# EAGLE board SMS_Voteing (EAGLE 5.01)
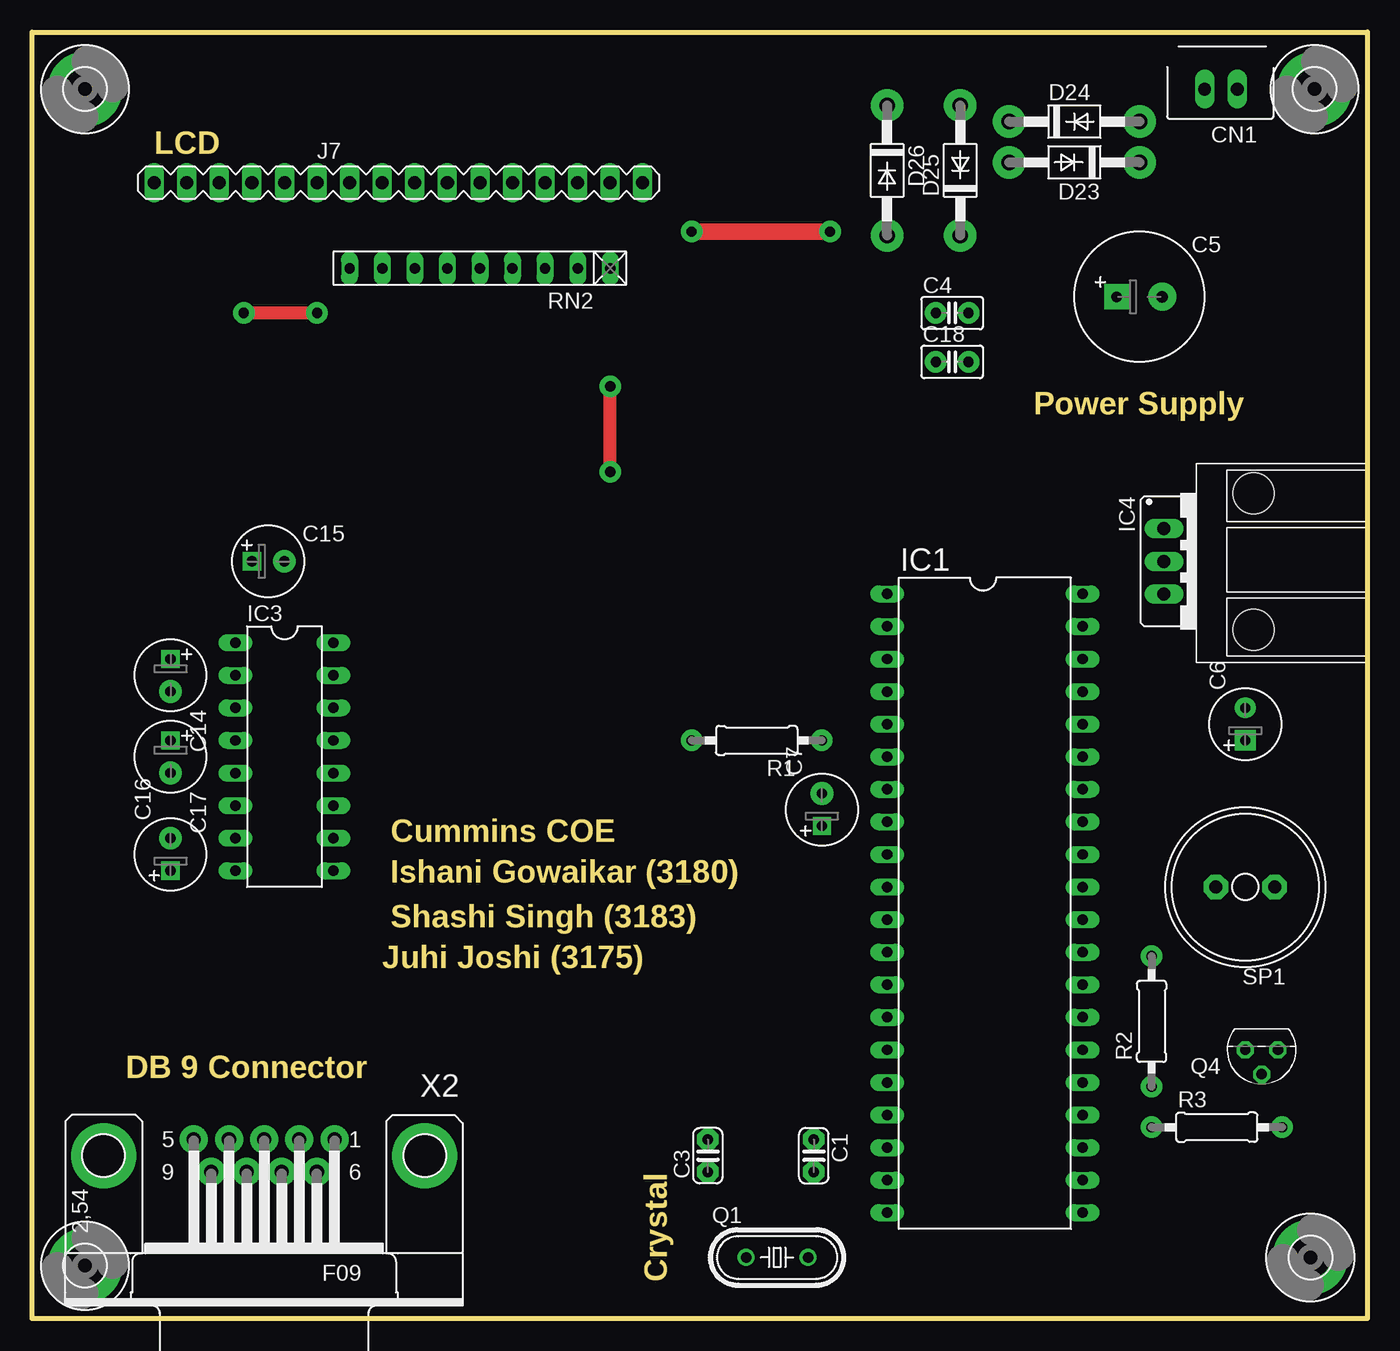
[diagram p0: board, top side]
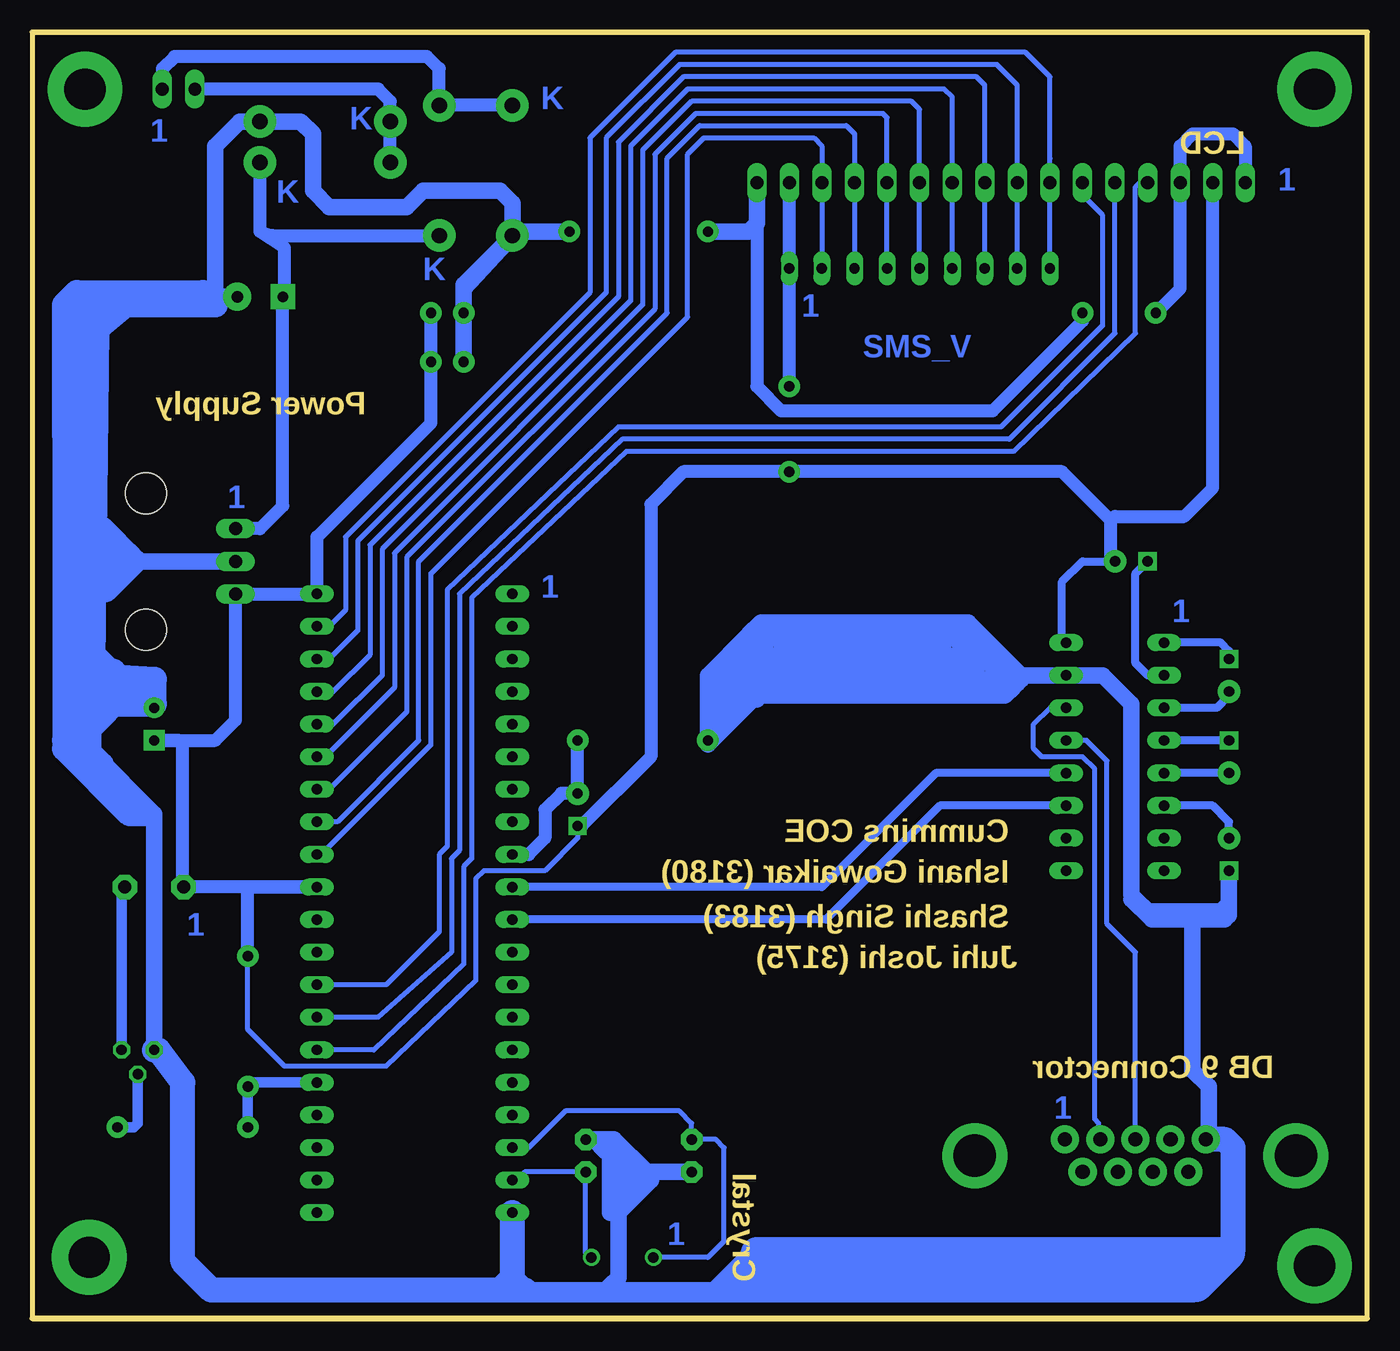
[diagram p1: board, bottom side, seen from below]

Size 104.14 x 100.33 mm. Coordinates in mm from the lower left corner, seen from the top.
Outline: 0.01,0.17 104.12,0.17 104.12,100.17 0.01,100.17 0.01,0.17
Outline: 0,100.33 104.14,100.33 104.14,0 0,0 0,100.33
Copper layers (1+16): Top 0.035mm / dielectric 1.5mm / Bottom 0.035mm
Design rules "default": minimum track width 10mil, minimum drill 24mil, track to track 12mil, track to pad 12mil, pad to pad 12mil, via to via 12mil, smd to smd 12mil, copper to edge 40mil, drill to drill 8mil, minimum pad ring 10mil, minimum via ring 8mil, stop-mask expansion 8mil, vias tented up to drill 0mil, thermal gap 10mil

## Footprints (pad centres in the part's own frame; a part is rotated, then mirrored left to right if it is on the bottom)
C025-024X044 = drill 0.813 pad 1.676 octagon: 1 -1.27,0; 2 1.27,0
C025-025X050 = drill 0.8 pad 1.676 round: 1 -1.27,0; 2 1.27,0
E3,5-10 = drill 0.813 pad 1.93 square: + -1.778,0 | drill 0.9 pad 2.184 round: - 1.778,0
E2,5-6 = drill 0.8 pad 1.6 square: + -1.27,0 | drill 0.8 pad 1.6 round: - 1.27,0
E2,5-6@1 = drill 0.8 pad 1.422 square: + -1.27,0 | drill 0.8 pad 1.778 round: - 1.27,0
JP2 = drill 1 long: 1 2.54,0; 2 5.08,0
DO41-10 = drill 1.2 pad 2.54 round: A 5.08,0; C -5.08,0
3,2-PAD = drill 3.2 pad 5.842 round: B3,2 0,0
HEATSINK = hole 3.2: 2.31,4.445; 12.97,4.445
DIL40 = drill 0.813 long: 1 -24.13,-7.62; 2 -21.59,-7.62; 3 -19.05,-7.62; 4 -16.51,-7.62; 5 -13.97,-7.62; 6 -11.43,-7.62; 7 -8.89,-7.62; 8 -6.35,-7.62; 9 -3.81,-7.62; 10 -1.27,-7.62; 11 1.27,-7.62; 12 3.81,-7.62; 13 6.35,-7.62; 14 8.89,-7.62; 15 11.43,-7.62; 16 13.97,-7.62; 17 16.51,-7.62; 18 19.05,-7.62; 19 21.59,-7.62; 20 24.13,-7.62; 21 24.13,7.62; 22 21.59,7.62; 23 19.05,7.62; 24 16.51,7.62; 25 13.97,7.62; 26 11.43,7.62; 27 8.89,7.62; 28 6.35,7.62; 29 3.81,7.62; 30 1.27,7.62; 31 -1.27,7.62; 32 -3.81,7.62; 33 -6.35,7.62; 34 -8.89,7.62; 35 -11.43,7.62; 36 -13.97,7.62; 37 -16.51,7.62; 38 -19.05,7.62; 39 -21.59,7.62; 40 -24.13,7.62
DIL16 = drill 0.813 long: 1 -8.89,-3.81; 2 -6.35,-3.81; 3 -3.81,-3.81; 4 -1.27,-3.81; 5 1.27,-3.81; 6 3.81,-3.81; 7 6.35,-3.81; 8 8.89,-3.81; 9 8.89,3.81; 10 6.35,3.81; 11 3.81,3.81; 12 1.27,3.81; 13 -1.27,3.81; 14 -3.81,3.81; 15 -6.35,3.81; 16 -8.89,3.81
78XXS = drill 1.016 long: GND 0,-2.54; IN -2.54,-2.54; OUT 2.54,-2.54
JP16 = drill 1.016 pad 1.27 long: 1 -19.05,0; 2 -16.51,0; 3 -13.97,0; 4 -11.43,0; 5 -8.89,0; 6 -6.35,0; 7 -3.81,0; 8 -1.27,0; 9 1.27,0; 10 3.81,0; 11 6.35,0; 12 8.89,0; 13 11.43,0; 14 13.97,0; 15 16.51,0; 16 19.05,0
HC49/S = drill 0.813 round: 1 -2.413,0; 2 2.413,0
TO92 = drill 0.813 octagon: 1 1.27,0; 2 0,1.905; 3 -1.27,0
0207/10 = drill 0.8 pad 1.676 round: 1 -5.08,0; 2 5.08,0
RN-9 = drill 0.813 long: 1 -10.16,0; 2 -7.62,0; 3 -5.08,0; 4 -2.54,0; 5 0,0; 6 2.54,0; 7 5.08,0; 8 7.62,0; 9 10.16,0
AL11P = drill 1.016 pad 1.905 octagon: + 2.286,0; - -2.286,0
F09HP = drill 1.1 pad 2.184 round: 1 -5.486,-1.27; 2 -2.743,-1.27; 3 0,-1.27; 4 2.743,-1.27; 5 5.486,-1.27; 6 -4.115,1.27; 7 -1.372,1.27; 8 1.372,1.27; 9 4.115,1.27 | drill 3.302 pad 5.08 round: G1 -12.522,0; G2 12.522,0

## Placement (x,y rotation side)
C1  33pF  [C025-024X044]  60.96,12.7 270 top
C3  33pF  [C025-024X044]  52.7,12.7 90 top
C4  0.1uF  [C025-025X050]  71.76,78.42 0 top
C5  1000uF/25V  [E3,5-10]  86.36,79.69 0 top
C6  220uF/16v  [E2,5-6]  94.62,46.35 90 top
C7  1uF/16V  [E2,5-6@1]  61.59,39.69 90 top
C14  1uF/16V  [E2,5-6@1]  10.79,50.16 270 top
C15  1uF/16V  [E2,5-6@1]  18.42,59.05 0 top
C16  1uF/16V  [E2,5-6@1]  10.79,36.2 90 top
C17  1uF/16V  [E2,5-6@1]  10.79,43.81 270 top
C18  0.1uF  [C025-025X050]  71.76,74.61 0 top
CN1  JP2E  [JP2]  96.52,95.89 180 top
D23  1N4007  [DO41-10]  81.28,90.17 180 top
D24  1N4007  [DO41-10]  81.28,93.34 0 top
D25  1N4007  [DO41-10]  72.39,89.54 90 top
D26  1N4007  [DO41-10]  66.68,89.54 270 top
H1  MOUNT-PAD-ROUND3.2  [3,2-PAD]  4.13,95.89 0 top
H2  MOUNT-PAD-ROUND3.2  [3,2-PAD]  4.13,4.13 0 top
H3  MOUNT-PAD-ROUND3.2  [3,2-PAD]  99.7,4.76 0 top
H4  MOUNT-PAD-ROUND3.2  [3,2-PAD]  100.01,95.89 0 top
HS3  HSD  [HEATSINK]  90.81,66.68 270 top
IC1  89S52  [DIL40]  74.3,32.38 270 top
IC3  MAX232  [DIL16]  19.69,43.81 270 top
IC4  7805  [78XXS]  90.81,59.05 270 top
J7  16 PIN MALE BURG  [JP16]  28.58,88.58 0 top
Q1  11.0592MHz  [HC49/S]  58.1,4.76 0 top
Q4  BC547  [TO92]  95.89,20.96 180 top
R1  1K  [0207/10]  56.52,45.09 180 top
R2  1K  [0207/10]  87.31,23.18 90 top
R3  1K  [0207/10]  92.39,14.92 0 top
RN2  10K  [RN-9]  34.92,81.92 180 top
SP1  BUZZER  [AL11P]  94.62,33.66 180 top
X2  [F09HP]  18.1,12.7 180 top

## Library data of the parts
C1 C3-C7 C14-C18 R1-R3 = resistor
CN1 J7 = relimate
D23-D26 = diode
H1-H4 = holes
HS3 = HEATSINK
IC1 = micro-intel
IC3 = maxim
IC4 = v-reg
Q1 = crystal
Q4 = transistor-npn
RN2 = resistor-net
SP1 = buzzer
X2 = con-subd

## Nets
+5V: C4.2 C6.+ C7.+ C15.- C18.2 IC1.31 IC1.40 IC3.16 IC4.OUT J7.2 J7.15 R2.2 RN2.1 SP1.+
+12V_R: C5.+ D23.C D25.C IC4.IN
GND: C1.1 C3.1 C4.1 C5.- C6.- C16.+ C18.1 D24.A D26.A IC1.20 IC3.15 IC4.GND J7.1 J7.3 J7.16 Q4.1 R1.2 X2.5
N$1: IC3.14 X2.2
N$3: IC3.13 X2.3
N$6: IC1.6
N$10: C14.+ IC3.1
N$12: C14.- IC3.3
N$13: C17.+ IC3.4
N$14: C17.- IC3.5
N$15: C15.+ IC3.2
N$16: C16.- IC3.6
N$18: CN1.1 D25.A D26.C
N$22: C3.2 IC1.18 Q1.1
N$23: C1.2 IC1.19 Q1.2
N$24: Q4.2 R3.2
N$25: Q4.3 SP1.-
N$56: CN1.2 D23.A D24.C
P0.0: IC1.39 J7.7 RN2.9
P0.1: IC1.38 J7.8 RN2.8
P0.2: IC1.37 J7.9 RN2.7
P0.3: IC1.36 J7.10 RN2.6
P0.4: IC1.35 J7.11 RN2.5
P0.5: IC1.34 J7.12 RN2.4
P0.6: IC1.33 J7.13 RN2.3
P0.7: IC1.32 J7.14 RN2.2
P1.0: IC1.1
P1.1: IC1.2
P1.2: IC1.3
P1.3: IC1.4
P1.4: IC1.5
P1.6: IC1.7
P1.7: IC1.8
P2.0: IC1.21
P2.1: IC1.22
P2.2: IC1.23
P2.3: IC1.24
P2.4: IC1.25 R2.1 R3.1
P2.5: IC1.26 J7.4
P2.6: IC1.27 J7.5
P2.7: IC1.28 J7.6
P3.0: IC1.10 IC3.12
P3.1: IC1.11 IC3.11
P3.2: IC1.12
P3.3: IC1.13
P3.4: IC1.14
P3.5: IC1.15
P3.6: IC1.16
P3.7: IC1.17
RST: C7.- IC1.9 R1.1

## Tracks (layer width: path | path; a pad name or v marks a point on that pad's centre or on a via)
+5V  (via drill 0.8 pad 1.68)
  Top 1.016: v45.09,66.04 v45.09,72.71
  Bottom 0.406: C7.+ 61.59,37.46 64.14,34.92 68.9,34.92 69.53,34.29 69.53,26.35 76.52,19.69 84.45,19.69 87.31,22.54 R2.2
  Bottom 0.61: C15.- 22.23,59.05 23.81,57.47 23.81,53.02 IC3.16
  Bottom 1.016: 92.08,33.66 IC1.31 87,33.66 87.31,33.34 R2.2 | J7.15 RN2.1 v45.09,72.71 | 20,62.23 23.81,66.04 v45.09,66.04 53.34,66.04 55.88,63.5 55.88,43.81 61.28,38.42 C7.+ | 20,62.23 20,59.37 C15.- | J7.2 12.06,64.77 14.29,62.55 19.69,62.55 20,62.23 | C4.2 C18.2 73.03,69.85 81.92,60.96 IC1.40 IC4.OUT 88.27,46.67 89.85,45.09 C6.+ 92.71,45.09 92.39,44.77 92.39,33.97 92.08,33.66 | 92.08,33.66 SP1.+
+12V_R
  Bottom 1.016: 86.36,84.77 85.41,84.45 D25.C | 86.36,84.77 D23.C | 86.36,84.77 84.45,83.5 84.45,79.69 C5.+ 84.58,63.37 86.36,61.59 IC4.IN
GND  (via drill 0.8 pad 1.68)
  Top 1.016: v22.23,78.42 v16.51,78.42
  Top 1.27: v62.23,84.77 v51.43,84.77
  Bottom 1.016: J7.1 9.53,91.44 10.48,92.39 13.65,92.39 14.61,91.44 J7.3 14.61,80.33 v16.51,78.42 | v22.23,78.42 22.23,77.79 29.21,70.8 45.72,70.8 47.62,72.71 J7.16
  Bottom 1.27: 60.32,13.97 C1.1 | 60.32,13.97 58.74,13.97 56.2,11.43 | 56.2,11.43 C3.1 | 56.2,11.43 56.52,11.11 | 56.52,11.11 56.83,10.79 59.05,13.02 59.37,13.02 60.32,13.97 | 59.05,12.7 60.32,13.97 | 59.05,12.7 57.15,10.79 | 59.05,12.7 59.05,10.16 57.47,10.16 | 57.47,10.16 56.52,11.11 | 56.52,11.11 57.78,11.11 58.1,10.79 57.47,10.16 | 57.47,10.16 59.05,8.57 59.05,12.7 | 59.05,12.7 59.05,8.26 58.74,8.26 55.88,11.11 55.88,10.79 58.42,8.26 58.42,3.17 59.05,2.54 | 59.05,2.54 59.37,2.22 65.72,2.22 66.36,2.86 66.36,7.62 66.68,7.94 IC1.20 66.68,3.49 | 48.26,3.49 49.53,2.22 50.48,2.22 58.74,2.22 59.05,2.54 | 17.15,31.75 18.42,33.02 18.42,47.94 20.64,50.16 IC3.15 26.99,50.16 31.12,54.29 33.97,54.29 | 17.15,31.75 11.43,31.75 10.79,32.38 C16.+ 10.79,31.43 11.11,31.12 16.83,31.12 18.42,32.7 18.1,32.7 17.15,31.75 | 17.15,31.75 14.61,31.75 13.65,30.8 13.65,19.37 12.38,18.1 12.38,14.61 12.7,14.29 12.61,14.2 X2.5 | 66.68,3.49 65.72,2.54 | 66.68,3.49 66.68,2.86 65.72,1.91 49.53,1.91 48.89,2.54 48.26,3.17 | Q4.1 94.62,39.37 99.38,44.13 99.38,46.35 98.11,47.62 C6.- | J7.16 47.62,85.41 48.26,84.77 v51.43,84.77 | D26.A 66.68,84.77 v62.23,84.77 | D26.A 70.48,80.33 C4.1 | C4.1 C18.1 | IC4.GND 96.2,59.05 97.47,59.05 97.79,59.37 99.38,60.32 99.38,76.52 95.57,79.69 C5.- 89.54,79.69 89.85,80.01 89.85,91.44 87.95,93.34 D24.A 83.19,93.34 82.23,92.39 82.23,87.95 80.96,86.68 74.93,86.68 73.66,87.95 67.63,87.95 66.68,87 D26.A | C4.1 70.48,80.65 D26.A | R1.2 51.43,50.16 48.26,53.34 | 48.26,53.34 47.62,53.98 47.62,48.58 51.43,44.77 51.43,49.21 48.58,52.07 48.58,48.58 50.48,46.67 50.48,48.89 49.21,50.16 49.21,49.21 50.16,48.26 47.62,48.26 47.31,48.58 28.58,48.58
  Bottom 1.27: 33.97,54.29 32.38,54.29 27.94,49.85 26.99,49.85 28.26,48.58 | 33.97,54.29 47.31,54.29 48.26,53.34 | 48.26,53.34 48.26,51.12 46.67,49.53 32.38,49.53 31.43,50.48 31.43,49.85 31.75,49.53 31.75,53.02 46.67,53.02 46.99,53.34 46.99,51.12 46.04,50.16 33.66,50.16 32.38,51.43 32.38,50.8 32.7,50.48 32.7,51.75 33.02,52.07 45.72,52.07 46.04,51.75 33.66,51.75 33.02,51.12 35.24,51.12 | 35.24,51.12 45.4,51.12 | 35.24,51.12 32.07,54.29 33.97,54.29 | 28.26,48.58 27.62,49.21 | 27.62,49.21 30.48,52.07 30.48,50.16 30.8,49.85 29.53,49.85 29.21,49.53 30.48,49.53 30.8,49.21 27.62,49.21 | 27.62,49.21 27.31,49.53 27.62,49.53 28.58,48.58 | 28.58,48.58 28.26,48.58
  Bottom 1.93: 47.62,5.08 50.48,2.22 13.65,2.22 10.48,5.4 10.48,13.33 11.11,13.97 X2.5 | IC1.20 66.68,3.17 67.63,2.22 65.72,2.22 90.17,2.22 92.39,4.45 92.39,18.42 94.3,20.96 Q4.1 | 98.11,47.62 97.79,47.94 94.62,47.94 94.62,49.85 99.7,50.16 100.01,49.85 | 100.01,49.85 101.28,48.58 101.28,45.72 98.74,43.18 98.74,42.86 95.25,39.37 96.52,39.37 101.6,44.45 101.6,45.09 | 101.6,45.09 100.01,46.67 100.01,47.94 99.38,48.58 96.52,48.58 96.2,48.89 96.84,48.89 99.7,46.04 100.65,46.04 101.6,45.09 | 101.6,68.9 101.6,45.09 | 101.6,68.9 100.01,68.9 100.01,49.85 | 100.01,49.85 100.01,50.48 99.38,51.12 | 99.38,51.12 98.74,50.48 | 99.38,51.12 98.74,51.12 | 98.74,51.12 98.11,50.48 | 98.74,51.12 99.06,51.43 99.38,51.12 | 99.38,51.12 97.79,50.48 | 99.38,51.12 99.7,52.7 99.7,52.39 99.38,51.12 | 99.38,51.12 99.06,77.15 | 99.06,77.15 99.7,78.11 101.28,78.11 101.6,77.79 101.6,77.47 | 101.6,68.9 101.6,77.47 | 101.6,68.9 100.65,67.95 100.65,70.8 99.7,71.76 99.7,76.52 100.01,76.84 100.97,76.84 101.6,77.47 | 101.6,77.47 101.6,79.06 100.65,80.01 90.81,80.01 89.85,79.06 98.11,79.06 99.06,78.11 99.06,77.15 | 97.79,59.37 97.47,59.69 96.84,59.69 96.52,59.37 96.84,59.37 99.06,61.59 98.74,61.59 96.2,59.05 98.43,56.83 99.7,56.83 98.43,57.47 97.16,58.74 96.84,58.74 | 99.06,77.15 99.38,76.52 99.38,61.28 98.74,56.83 96.84,58.74 | 96.84,58.74 96.52,58.74
  Bottom 2.54: 48.89,2.54 13.33,2.54 10.79,5.08 47.62,5.08 11.75,4.76
N$1
  Bottom 0.406: IC3.14 24.77,47.62 26.04,46.35 26.04,44.45 25.4,43.81 22.23,43.81 21.27,42.86 21.27,15.56 20.96,15.24 20.96,13.97 X2.2
N$3
  Bottom 0.406: X2.3 18.1,28.58 20.32,30.8 20.32,43.5 21.91,45.09 IC3.13
N$10
  Bottom 0.61: C14.+ 10.79,52.07 11.43,52.7 IC3.1
N$12
  Bottom 0.61: C14.- 10.79,48.58 11.75,47.62 IC3.3
N$13
  Bottom 0.61: C17.+ IC3.4
N$14
  Bottom 0.61: C17.- IC3.5
N$15
  Bottom 0.61: IC3.2 17.15,50.16 18.1,51.12 18.1,58.1 C15.+
N$16
  Bottom 0.61: C16.- 10.79,38.73 12.06,40 IC3.6
N$18
  Bottom 1.016: D26.C D25.A 72.39,97.47 73.34,98.43 93.03,98.43 93.98,97.47 CN1.1
N$22
  Bottom 0.406: Q1.1 51.43,4.76 50.16,6.03 50.16,13.33 50.8,13.97 C3.2 52.7,15.24 53.66,16.19 62.55,16.19 65.41,13.33 IC1.18
N$23
  Bottom 0.406: Q1.2 60.64,4.76 60.96,5.08 C1.2 65.72,11.43 66.36,10.79 IC1.19
N$24
  Bottom 0.813: R3.2 96.2,14.92 95.89,15.24 Q4.2
N$25
  Bottom 0.813: SP1.- 96.84,33.66 97.16,33.34 Q4.3
N$56
  Bottom 1.016: CN1.2 77.15,95.89 76.2,94.93 D24.C D23.A
P0.0
  Bottom 0.406: 24.77,90.49 J7.7 RN2.9 24.77,96.84 26.67,98.74 53.98,98.74 60.64,92.08 60.64,80.01 79.69,60.96 79.69,55.24 80.96,53.98 IC1.39
P0.1
  Bottom 0.406: IC1.38 80.96,51.43 78.74,53.66 78.74,60.64 59.37,80.01 59.37,92.08 53.66,97.79 28.89,97.79 27.31,96.2 J7.8 27.62,88.58 27.31,88.27 RN2.8
P0.2
  Bottom 0.406: IC1.37 80.65,48.89 77.79,51.75 77.79,60.32 58.42,79.69 58.42,91.76 53.34,96.84 30.48,96.84 29.85,96.2 J7.9 RN2.7
P0.3
  Bottom 0.406: IC1.36 80.65,46.35 76.84,50.16 76.84,60.01 57.47,79.38 57.47,91.44 53.02,95.89 33.02,95.89 32.38,95.25 J7.10 RN2.6
P0.4
  Bottom 0.406: IC1.35 81.28,43.81 75.88,49.21 75.88,59.69 56.52,79.06 56.52,91.12 52.7,94.93 35.56,94.93 34.92,94.3 34.92,88.9 | 34.92,88.9 J7.11 | RN2.5 34.92,88.9
P0.5
  Bottom 0.406: IC1.34 80.96,41.27 74.93,47.31 74.93,59.37 55.56,78.74 55.56,90.81 52.39,93.98 37.78,93.98 37.46,93.66 J7.12 37.78,88.58 37.46,88.27 RN2.4
P0.6
  Bottom 0.406: IC1.33 80.33,38.73 73.98,45.09 73.98,59.05 54.61,78.42 54.61,90.49 52.07,93.03 40.64,93.03 40,92.39 J7.13 RN2.3
P0.7
  Bottom 0.406: IC1.32 81.6,36.2 73.03,44.77 73.03,58.1 53.02,78.11 53.02,90.81 51.75,92.08 43.18,92.08 42.54,91.44 J7.14 42.86,88.58 42.54,88.27 RN2.2
P2.4
  Bottom 0.813: IC1.25 87,18.42 R2.1 R3.1
P2.5
  Bottom 0.406: J7.4 17.15,89.22 18.1,88.27 18.1,76.84 27.62,67.63 57.78,67.63 69.85,56.2 69.85,35.88 70.48,35.24 70.48,27.62 77.47,20.96 IC1.26
P2.6
  Bottom 0.406: IC1.27 77.15,23.5 71.44,28.58 71.44,35.88 70.8,36.51 70.8,56.52 58.1,68.58 27.94,68.58 19.69,76.84 J7.5
P2.7
  Bottom 0.406: J7.6 22.23,87.63 20.64,86.04 20.64,77.47 28.58,69.53 58.42,69.53 71.76,56.83 71.76,36.83 72.39,36.2 72.39,30.16 76.52,26.04 IC1.28
P3.0
  Bottom 0.61: IC3.12 33.66,42.54 42.54,33.66 IC1.10
P3.1
  Bottom 0.61: IC3.11 33.34,40 42.23,31.12 IC1.11
RST
  Bottom 1.016: R1.1 C7.- 62.86,40.96 64.14,39.69 64.14,37.46 65.41,36.2 IC1.9

## Text on the board
Bottom: K | K | 1 | 1 | K | K | 1 | SMS_V | 1 | 1 | 1 | 1 | 1 | 1
Dimension: LCD | Power Supply | Cummins COE | Ishani Gowaikar (3180) | Shashi Singh (3183) | Juhi Joshi (3175) | DB 9 Connector | Crystal